# EAGLE board eurorack_adapter (EAGLE 9.6.0)

Size 70.03 x 17.14 mm. Coordinates in mm from the lower left corner, seen from the top.
Outline: 0,0 70.03,0 70.03,17.14 0,17.14 0,0
Copper layers (1*16): Top 0.0356mm / dielectric 1.5011mm / Bottom 0.0356mm
Design rules "pigatron": minimum track width 12mil, minimum drill 13mil, track to track 15mil, track to pad 10mil, pad to pad 10mil, via to via 10mil, smd to smd 6mil, copper to edge 15mil, drill to drill 10mil, minimum pad ring 12mil, minimum via ring 10mil, stop-mask expansion 4mil, vias tented up to drill 0mil, thermal gap 10mil
Holes 3 mm at 7.49,13.84 12.57,13.84 17.65,13.84 22.73,13.84 27.81,13.84 32.89,13.84 37.97,13.84 43.05,13.84 48.13,13.84 53.21,13.84 58.29,13.84 63.37,13.84 34.92,4.95 17.14,4.95 52.7,4.95

## Placement (x,y rotation side)
U$1  [PIGATRON-LOGO]  35.56,8.89 0 top

## Library data of the parts
U$1 = mechanical